# Altium PCB PCB.PcbDoc (part 1 of 2)
Units mm, origin at the board's own origin, x right, y up, seen from the top; angles counter-clockwise.
Board outline 225.9 x 54.5 mm, 2 copper layers (Top Layer, Bottom Layer); 254 components, 305 nets, 976 pads, 364 vias.
Unrouted connection lines stored in the file: 1.
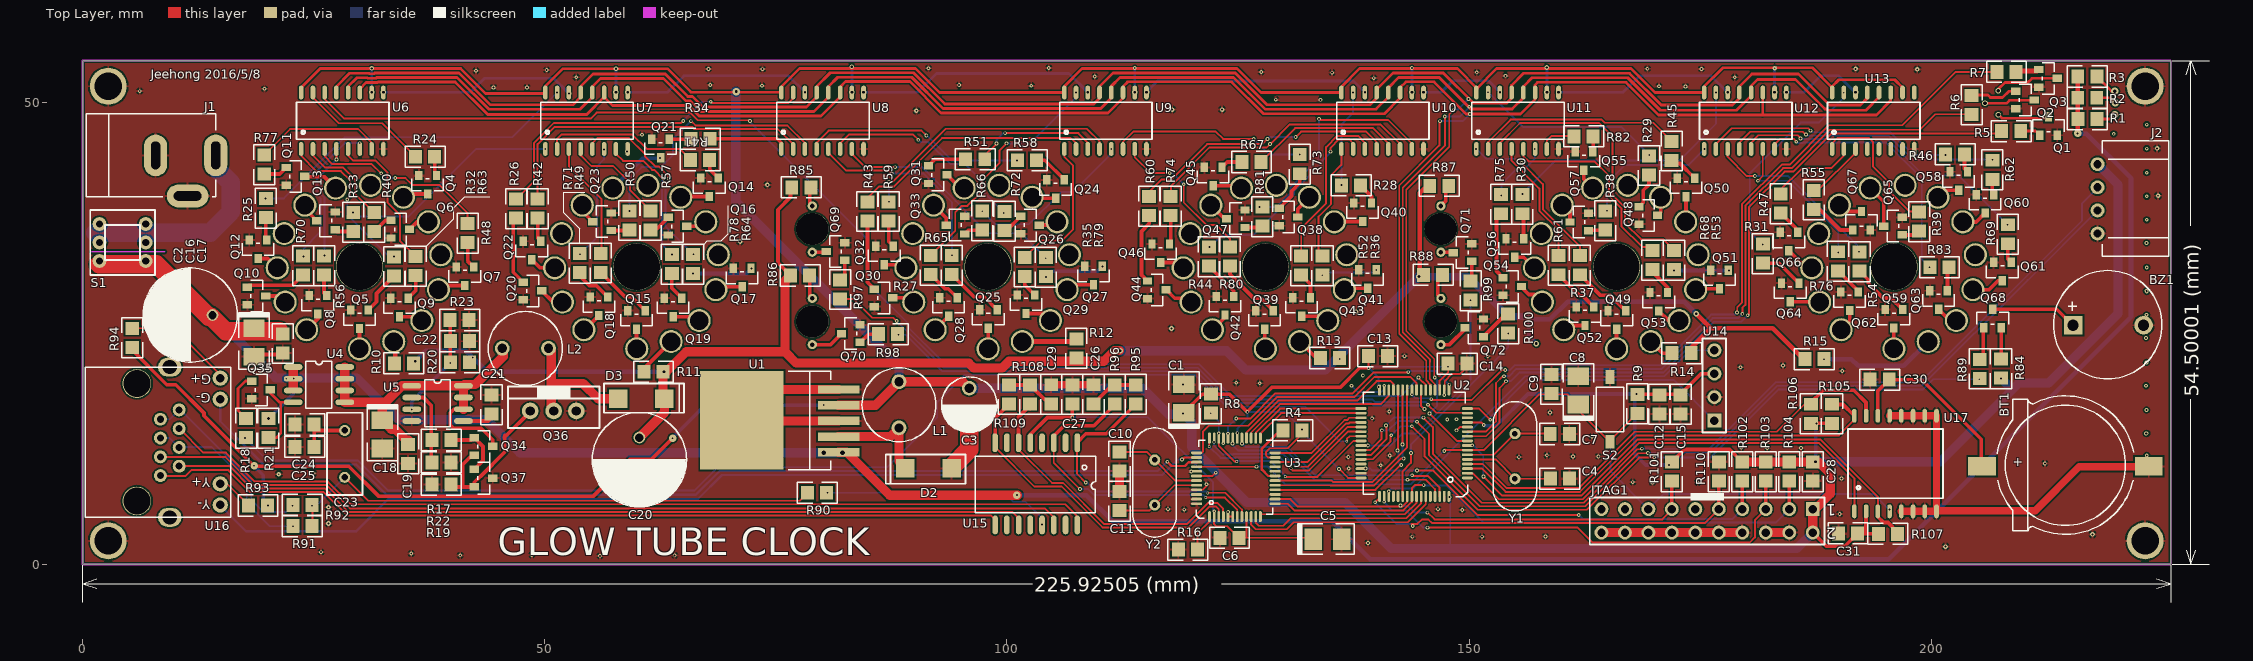
[diagram p0: Top Layer view]
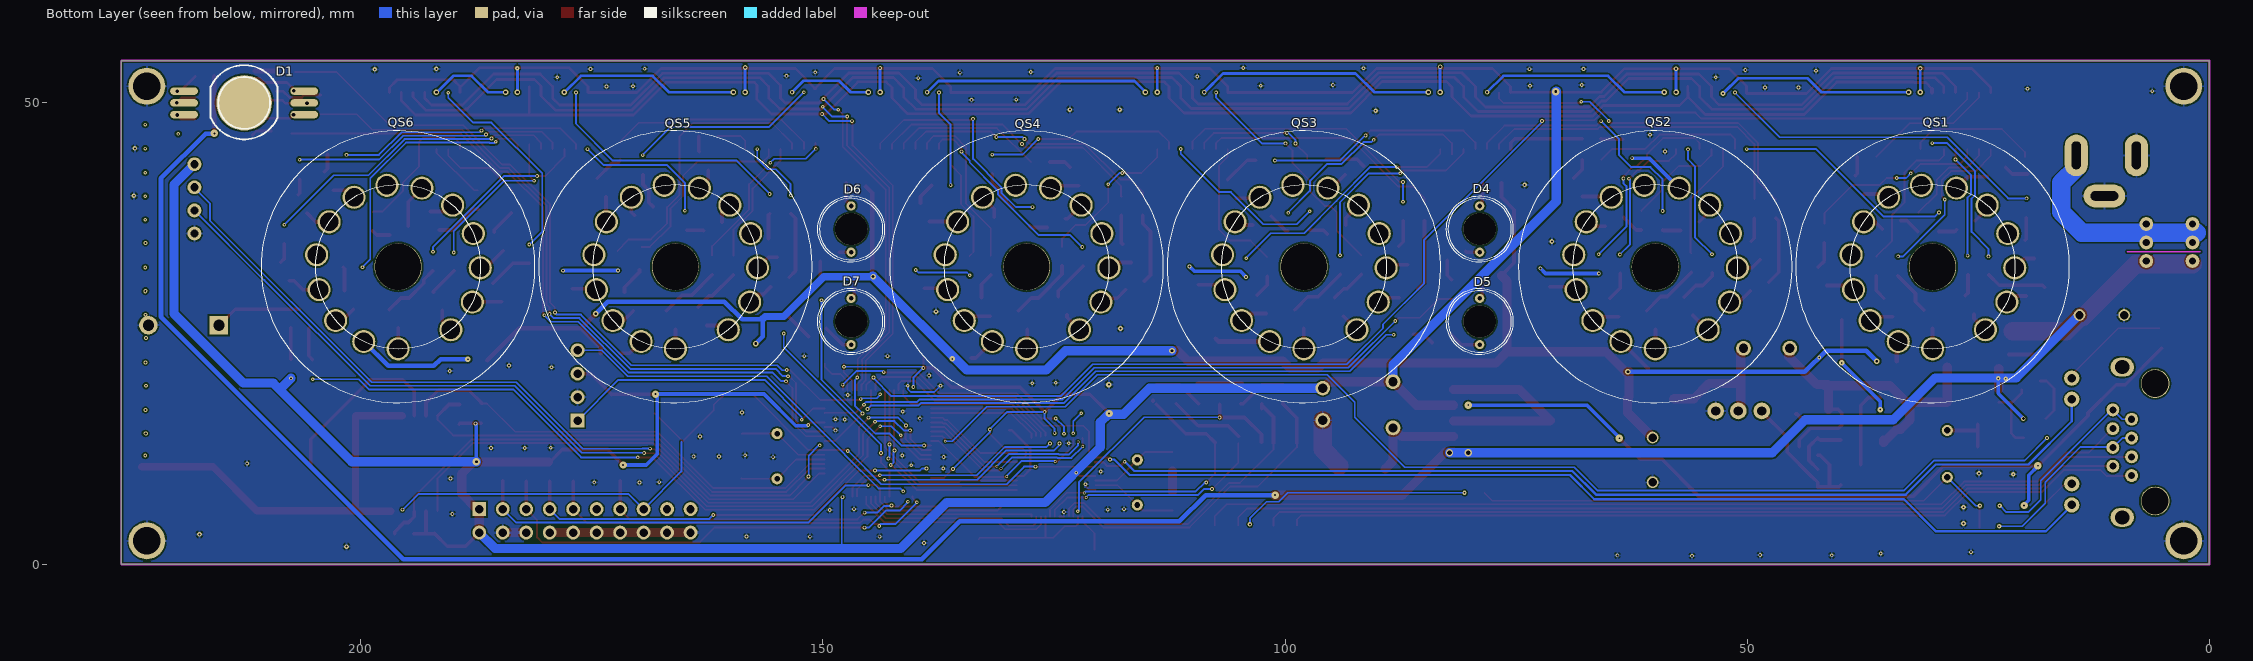
[diagram p1: Bottom Layer view, seen from below]

## Layer stack, top to bottom
Top Layer: signal copper 0.0356
Dielectric: dielectric 0.32, FR-4, Dk 4.8
Bottom Layer: signal copper 0.0356

## Board outline
0,54.5 0,0 225.9,0 225.9,54.5 0,54.5

## Design rules (kind name [scope] priority, off if disabled: settings)
Clearance [All] p1: gap=0.178
FabricationTestpoint [(IsPad And (OnTopLayer Or OnBottomLayer))] p1: side=3 testpointundercomponent=TRUE minsize=1.016 maxsize=2.54 preferedsize=1.524 minholesize=0 maxholesize=1.016 preferedholesize=0.813 testpointgrid=0.025 allowsidetop=TRUE allowsidebottom=TRUE usegrid=TRUE gridtolerance=0
PolygonConnect [All] p1: connectstyle=Relief reliefconductorwidth=0.254 reliefentries=4 polygonreliefangle="90 Angle"
RoomDefinition Sheet [InComponentClass('Sheet')] p1: confinementstyle=ConfineIn formatcopy=TRUE lockcomponents=FALSE outline -216.5,-246.109 -165.7,-246.109 -165.7,-220.709 -216.5,-220.709
RoutingVias [All] p1: holewidth=0.2 width=0.4 viastyle="Through Hole" minholewidth=0.1 minwidth=0.2 maxholewidth=3 maxwidth=5
SilkscreenOverComponentPads [All] p1: minsilkscreentomaskgap=0.254
SolderMaskExpansion [All] p1: expansion=0.102
Width [All] p1: maxlimit=4 minlimit=0.2 preferedwidth=0.254
26 further rules are at their usual default settings.

## Components (designator, comment, footprint, x,y, rotation, side; value= is the part's Value field where it differs from the comment)
BT1 "Battery" CR1220 214.75,10.35 r180 top locked
BZ1 "BELL" BEEZ 219.025,25.875 r180 top locked
C1 "Cap Pol1" SMT_CAP_DAN 119.125,18.025 r90 top
C2 "680uF/50V" 470/50V 11.775,26.975 r270 top
C3 "220uF/25V" 330/25V 95.92,17.289 r90 top
C4 "Cap" SMT0805 159.8,9.275 r0 top
C5 "Cap Pol1" SMT_CAP_DAN 134.75,2.725 r0 top
C6 "Cap" SMT0805 124.075,2.875 r180 top
C7 "Cap" SMT0805 159.785,14.105 r0 top
C8 "Cap Pol1" SMT_CAP_DAN 161.8,18.9 r90 top
C9 "Cap" SMT0805 158.9,19.5 r90 top
C10 "Cap" SMT0805 112.171,11.151 r270 top
C11 "Cap" SMT0805 112.171,6.833 r90 top
C12 "Cap" SMT0805 170.575,17.325 r270 top
C13 "Cap" SMT0805 140.125,22.525 r0 top
C14 "Cap" SMT0805 148.7,21.725 r0 top
C15 "Cap" SMT0805 172.875,17.325 r270 top
C16 "10uF/25V" SMT_CAP_DAN 18.55,23.925 r270 top
C17 "Cap" SMT0805 21.65,23.9 r270 top
C18 "10uF/25V" SMT_CAP_DAN 32.42,13.987 r270 top
C19 "Cap" SMT0805 35.214,11.955 r270 top
C20 "10uF/250V" 470/50V 60.233,11.447 r0 top
C21 "Cap" SMT0805 44.231,17.289 r90 top
C22 "Cap" SMT0805 40.802,24.147 r0 top
C23 "Cap" RAD-0.2 28.356,11.955 r270 top
C24 "Cap" SMT0805 24.038,15.13 r180 top
C25 "Cap" SMT0805 24.038,12.717 r180 top
C26 "Cap" SMT0805 109.358,18.39 r90 top
C27 "Cap" SMT0805 107.072,18.39 r270 top
C28 "Cap Semi" SMT0805 187.166,10.043 r90 top
C29 "Cap" SMT0805 104.786,18.39 r90 top
C30 "Cap Semi" SMT0805 194.396,19.986 r0 top
C31 "Cap Semi" SMT0805 190.975,3.35 r0 top
D1 "RGB" LED-RGB 212.6,49.925 r180 bottom
D2 "1N5824" FR107 94,10.375 r180 top
D3 "FR107" FR107 57.947,17.924 r0 top
D4 "LED0" DO 78.938,36.275 r270 bottom locked
D5 "LED0" DO 78.938,26.275 r270 bottom locked
D6 "LED0" DO 146.938,36.275 r270 bottom locked
D7 "LED0" DO 146.938,26.275 r270 bottom locked
J1 "PWR2.5" DC 7.8,44.175 r180 top
J2 "Header 4" HEAD_DIP4 217.85,39.475 r270 top
JTAG1 "Header 10X2H" HDR2X10 187.166,5.979 r180 top
L1 "33uH" L 88.3,17.289 r90 top
L2 "330uH" L 47.914,23.385 r0 top
Q1 "8050" SOP-23 211.725,46.425 r0 top
Q2 "8050" SOP-23 209.125,51.175 r270 top
Q3 "8050" SOP-23 211.625,53.525 r270 top
Q4 "A42" SOP-23 38.275,42.075 r180 top
Q5 "A42" SOP-23 30.9,27.525 r180 top
Q6 "A42" SOP-23 33.375,37.2 r270 top
Q7 "A42" SOP-23 42.3,32.175 r180 top
Q8 "A42" SOP-23 26.4,29.075 r180 top
Q9 "A42" SOP-23 35.225,28.8 r180 top
Q10 "A42" SOP-23 17.825,29.975 r270 top
Q11 "A42" SOP-23 22.025,42.925 r270 top
Q12 "A42" SOP-23 19.925,35.1 r180 top
Q13 "A42" SOP-23 27.325,36.225 r90 top
Q14 "A42" SOP-23 68.75,41.8 r180 top
Q15 "A42" SOP-23 60.868,27.449 r180 top
Q16 "A42" SOP-23 63.35,37.525 r270 top
Q17 "A42" SOP-23 72.3,32.025 r180 top
Q18 "A42" SOP-23 56.8,28.925 r180 top
Q19 "A42" SOP-23 64.825,28.8 r180 top
Q20 "A42" SOP-23 47.675,30.525 r270 top
Q21 "A42" SOP-23 63.475,46 r180 top
Q22 "A42" SOP-23 49.55,34.95 r180 top
Q23 "A42" SOP-23 57.2,36.125 r90 top
Q24 "A42" SOP-23 106.2,41.6 r180 top
Q25 "A42" SOP-23 98.925,27.55 r180 top
Q26 "A42" SOP-23 101.5,37.65 r270 top
Q27 "A42" SOP-23 110.3,32.25 r180 top
Q28 "A42" SOP-23 94.625,28.85 r180 top
Q29 "A42" SOP-23 103,29.15 r180 top
Q30 "A42" SOP-23 85.65,29.775 r270 top
Q31 "A42" SOP-23 91.5,43.1 r270 top
Q32 "A42" SOP-23 87.675,34.425 r180 top
Q33 "8050" SOP-23 95.425,35.75 r90 top
Q34 "8050" SOP-23 42.376,13.704 r270 top
Q35 "A40" SOP-23 18.3,19.825 r270 top
Q36 "MOSFET-N" TO-220 46.009,14.749 r0 top
Q37 "8550" SOP-23 42.376,10.275 r270 top
Q38 "A42" SOP-23 129.45,38.525 r270 top
Q39 "A42" SOP-23 128.813,27.449 r180 top
Q40 "A42" SOP-23 139.425,39.1 r180 top
Q41 "A42" SOP-23 139.95,31.875 r180 top
Q42 "A42" SOP-23 124.525,28.975 r180 top
Q43 "A42" SOP-23 132.825,28.85 r180 top
Q44 "A42" SOP-23 115.2,30.65 r270 top
Q45 "A42" SOP-23 123.25,42.95 r180 top
Q46 "A42" SOP-23 117.575,34.65 r180 top
Q47 "A42" SOP-23 125.75,36.45 r90 top
Q48 "A42" SOP-23 168.375,38.7 r270 top
Q49 "A42" SOP-23 166.913,27.449 r180 top
Q50 "A42" SOP-23 174.4,41.775 r180 top
Q51 "A42" SOP-23 178.025,31.825 r180 top
Q52 "A42" SOP-23 163.475,27.85 r180 top
Q53 "A42" SOP-23 171.45,29.425 r180 top
Q54 "A42" SOP-23 153.65,31 r270 top
Q55 "A42" SOP-23 163.35,44.65 r180 top
Q56 "A42" SOP-23 155.875,35.225 r180 top
Q57 "A42" SOP-23 162.9,36.1 r90 top
Q58 "A42" SOP-23 203.9,42.475 r180 top
Q59 "A42" SOP-23 196.885,27.576 r180 top
Q60 "A42" SOP-23 206.75,40 r180 top
Q61 "A42" SOP-23 208.625,32.675 r180 top
Q62 "A42" SOP-23 192.1,29.475 r180 top
Q63 "A42" SOP-23 201.725,29.6 r180 top
Q64 "A42" SOP-23 185.675,30.425 r180 top
Q65 "A42" SOP-23 196.85,35.65 r90 top
Q66 "A42" SOP-23 185.525,35.925 r180 top
Q67 "A42" SOP-23 191.5,36.175 r0 top
Q68 "8550" SOP-23 205.675,25.6 r0 top
Q69 "A40" SOP-23 82.458,32.91 r90 top
Q70 "A40" SOP-23 84.109,24.02 r90 top
Q71 "A40" SOP-23 150.276,32.783 r90 top
Q72 "A40" SOP-23 151.546,24.655 r90 top
QS1 "IN-4" IN-4 29.95,32.2 r180 bottom locked
QS2 "IN-4" IN-4 59.95,32.2 r180 bottom locked
QS3 "IN-4" IN-4 97.95,32.2 r180 bottom locked
QS4 "IN-4" IN-4 127.95,32.2 r180 bottom locked
QS5 "IN-4" IN-4 165.95,32.2 r180 bottom locked
QS6 "IN-4" IN-4 195.95,32.2 r180 bottom locked
R1 "Res2" SMT0805 216.875,48.175 r0 top
R2 "Res2" SMT0805 216.875,50.475 r180 top
R3 "Res2" SMT0805 216.85,52.775 r0 top
R4 "Res2" SMT0805 130.9,14.5 r180 top
R5 "Res2" SMT0805 208.65,46.875 r180 top
R6 "Res2" SMT0805 204.35,49.725 r270 top
R7 "Res2" SMT0805 208.125,53.275 r180 top
R8 "Res2" SMT0805 122.05,17.4 r270 top
R9 "Res2" SMT0805 168.2,17.375 r270 top
R10 "Res2" SMT0805 34.75,21.75 r0 top
R11 "Res2" SMT0805 61.757,20.845 r0 top
R12 "Res2" SMT0805 107.5,23.375 r270 top
R13 "Res2" SMT0805 134.925,22.325 r0 top
R14 "Res2" SMT0805 172.975,22.85 r0 top
R15 "Res2" SMT0805 187.35,22.2 r180 top
R16 "Res2" SMT0805 119.575,1.6 r180 top
R17 "Res2" SMT0805 38.82,13.45 r0 top
R18 "Res2" SMT0805 17.688,14.749 r90 top
R19 "Res2" SMT0805 38.82,8.624 r0 top
R20 "Res2" SMT0805 40.802,21.861 r0 top
R21 "Res2" SMT0805 20.101,14.749 r270 top
R22 "Res2" SMT0805 38.82,11.037 r180 top
R23 "Res2" SMT0805 40.802,26.433 r180 top
R24 "Res2" SMT0805 37.075,44.1 r180 top
R25 "Res2" SMT0805 19.825,38.525 r90 top
R26 "Res2" SMT0805 46.9,38.475 r90 top
R27 "Res2" SMT0805 91.75,32.375 r90 top
R28 "Res2" SMT0805 137.225,41 r180 top
R29 "Res2" SMT0805 169.45,43.15 r90 top
R30 "Res2" SMT0805 155.75,38.95 r90 top
R31 "Res2" SMT0805 181.775,33.6 r90 top
R32 "Res2" SMT0805 33.7,32.225 r90 top
R33 "Res2" SMT0805 29.275,37.025 r90 top
R34 "Res2" SMT0805 66.825,46.05 r0 top
R35 "Res2" SMT0805 101.925,32.175 r90 top
R36 "Res2" SMT0805 134.125,32.325 r90 top
R37 "Res2" SMT0805 161.975,32.35 r90 top
R38 "Res2" SMT0805 164.725,37.175 r90 top
R39 "Res2" SMT0805 198.675,37.075 r90 top
R40 "Res2" SMT0805 31.55,37.025 r90 top
R41 "Res2" SMT0805 66.825,43.75 r180 top
R42 "Res2" SMT0805 49.225,38.475 r90 top
R43 "Res2" SMT0805 84.9,38.175 r90 top
R44 "Res2" SMT0805 121.85,33.275 r90 top
R45 "Res2" SMT0805 171.9,44.725 r90 top
R46 "Res2" SMT0805 202.575,44.35 r180 top
R47 "Res2" SMT0805 183.7,39.025 r90 top
R48 "Res2" SMT0805 41.65,35.825 r90 top
R49 "Res2" SMT0805 56.05,32.6 r90 top
R50 "Res2" SMT0805 59.15,37.2 r90 top
R51 "Res2" SMT0805 96.55,43.825 r0 top
R52 "Res2" SMT0805 131.825,32.325 r90 top
R53 "Res2" SMT0805 172.15,32.9 r90 top
R54 "Res2" SMT0805 192.225,32.75 r90 top
R55 "Res2" SMT0805 187.275,39.425 r90 top
R56 "Res2" SMT0805 26.125,32.325 r90 top
R57 "Res2" SMT0805 61.45,37.2 r90 top
R58 "Res2" SMT0805 102.175,43.725 r180 top
R59 "Res2" SMT0805 87.2,38.175 r90 top
R60 "Res2" SMT0805 115.375,38.75 r90 top
R61 "Res2" SMT0805 159.675,32.35 r90 top
R62 "Res2" SMT0805 206.6,42.675 r90 top
R63 "Res2" SMT0805 36.025,32.25 r90 top
R64 "Res2" SMT0805 66.05,32.475 r90 top
R65 "Res2" SMT0805 94.025,32.375 r90 top
R66 "Res2" SMT0805 97.325,37.175 r90 top
R67 "Res2" SMT0805 126.45,43.525 r0 top
R68 "Res2" SMT0805 169.825,32.9 r90 top
R69 "Res2" SMT0805 208.275,35.7 r90 top
R70 "Res2" SMT0805 23.85,32.325 r90 top
R71 "Res2" SMT0805 53.775,32.575 r90 top
R72 "Res2" SMT0805 99.725,37.125 r90 top
R73 "Res2" SMT0805 131.675,43.275 r90 top
R74 "Res2" SMT0805 117.7,38.75 r90 top
R75 "Res2" SMT0805 153.45,38.95 r90 top
R76 "Res2" SMT0805 189.9,32.775 r90 top
R77 "Res2" SMT0805 19.65,43.25 r90 top
R78 "Res2" SMT0805 63.75,32.475 r90 top
R79 "Res2" SMT0805 104.2,32.15 r90 top
R80 "Res2" SMT0805 124.114,33.291 r90 top
R81 "Res2" SMT0805 127.625,37.625 r90 top
R82 "Res2" SMT0805 162.4,46.3 r180 top
R83 "Res2" SMT0805 200.875,32.15 r180 top
R84 "Res2" SMT0805 207.525,21.175 r90 top
R85 "Res2" SMT0805 77.759,40.784 r180 top
R86 "Res2" SMT0805 77.632,31.259 r180 top
R87 "Res2" SMT0805 146.775,40.95 r180 top
R88 "Res2" SMT0805 146.1,31.325 r180 top
R89 "Res2" SMT0805 205.225,21.15 r270 top
R90 "Res2" SMT0805 79.475,7.75 r180 top
R91 "Res2" SMT0805 23.775,4.15 r0 top
R92 "Res2" SMT0805 23.775,6.425 r0 top
R93 "Res2" SMT0805 18.975,6.375 r0 top
R94 "Res2" SMT0805 5.375,24.525 r270 top
R95 "Res2" SMT0805 113.925,18.4 r270 top
R96 "Res2" SMT0805 111.65,18.4 r270 top
R97 "Res2" SMT0805 81.95,29.735 r90 top
R98 "Res2" SMT0805 87.157,24.909 r180 top
R99 "Res2" SMT0805 150.149,29.608 r90 top
R100 "Res2" SMT0805 154.213,26.052 r90 top
R101 "Res2" SMT0805 171.926,10.043 r90 top
R102 "Res2" SMT0805 179.546,10.043 r270 top
R103 "Res2" SMT0805 182.086,10.043 r270 top
R104 "Res2" SMT0805 184.626,10.043 r90 top
R105 "Res2" SMT0805 189.243,16.309 r270 top
R106 "Res2" SMT0805 186.957,16.309 r270 top
R107 "Res2" SMT0805 195.3,3.3 r180 top
R108 "Res2" SMT0805 102.5,18.39 r270 top
R109 "Res2" SMT0805 100.214,18.39 r270 top
R110 "Res2" SMT0805 177.006,10.043 r270 top
S1 "Header 3X2A" LOCK_SW_DIP6 0.825,38.325 r270 top
S2 "SW-PB" KEY 165.225,16.9 r270 top
U1 "*" LM2575 71.409,15.511 r90 top
U2 "STM32F103RCT6" LQFP64 143.799,13.352 r180 top locked
U3 "DM9000" LQFP48 125.13,9.415 r90 top locked
U4 "AO4423L" SOP_8 25.562,19.575 r0 top
U5 "MC34063" SOP_8 38.389,17.543 r0 top
U6 "74HC595" SOT109-1 23.149,45.991 r0 top locked
U7 "74HC595" SOT109-1 49.565,45.991 r0 top locked
U8 "74HC595" SOT109-1 75.092,45.991 r0 top locked
U9 "74HC595" SOT109-1 105.699,45.991 r0 top locked
U10 "74HC595" SOT109-1 135.671,45.991 r0 top locked
U11 "74HC595" SOT109-1 150.276,45.991 r0 top locked
U12 "74HC595" SOT109-1 174.914,45.991 r0 top locked
U13 "74HC595" SOT109-1 188.757,45.991 r0 top locked
U14 "Header 4" HDR1X4 176.525,15.55 r90 top
U15 "HN16613CG" SOJ16-T 102.143,8.22 r270 top locked
U16 "RJ-45" RJ45-LED 0.35,21.35 r270 top locked
U17 "DS3231" DS3231 190.967,7.159 r0 top locked
Y1 "8M" XTAL_DIP 154.95,11.575 r270 top
Y2 "25M" XTAL_DIP 115.981,8.992 r90 top

## Footprints (in the part's own frame and the unit in brackets; to place one, negate y for a bottom-side part, rotate by r counter-clockwise, add the part's x,y. Pads: shape width x height; smd on the part's side, far side on the other; paste and mask are expansions set on the pad)
330/25V [mil]
  round 62 hole 39.37: 1(70,0) 2(-67,0)
  silkscreen extent -120,-120 118,120
470/50V [mil]
  round 50 hole 36: 1(0.1,89.6) 2(0.1,-100.56)
  silkscreen extent -201,-206 201,196
BEEZ [mm]
  rect 2x2 hole 1.2: 1(3.686,0)
  round 2 hole 1.2: 2(-3.934,0)
  silkscreen extent -5.9,-5.92 5.81,5.79
CR1220 [mm]
  rect 3x2 smd: 1(9.271,-0.254) 2(-8.763,-0.254)
  silkscreen extent -7.11,-7.88 7.65,7.1
DC [mm]
  oval 2.5x4.5 hole 1 slot 3 at 90 deg: 1(-6.604,-0.072) 3(-0.104,-0.072)
  oval 4.5x2.5 hole 1 slot 3 at 0 deg: 2(-3.556,4.318)
  silkscreen extent -6.6,-4.57 7.4,4.45
DO [mm]
  round 3.5 hole 3.5: 0(0,0)
  round 1 hole 0.5: 1(-2.5,0) 2(2.5,0)
  silkscreen extent -3.6,-3.6 3.6,3.6
DS3231 [mm]
  oval 0.5x1.5 smd: 1(0.7,-1.42) 2(1.97,-1.42) 3(3.24,-1.42) 4(4.51,-1.42) 5(5.78,-1.42) 6(7.05,-1.42) 7(8.32,-1.42) 8(9.59,-1.42) 9(9.59,8.92) 10(8.32,8.92) 11(7.05,8.92) 12(5.78,8.92) 13(4.51,8.92) 14(3.24,8.92) 15(1.97,8.92) 16(0.7,8.92)
  silkscreen extent 0,0 10.29,7.5
FR107 [mm]
  rect 2x2 smd: 1(0,0) 2(5,0)
  silkscreen extent -1.52,-1.52 7.11,1.65
HDR1X4 [mm] "Connector; Header; 4 Position"
  rect 1.5x1.5 hole 0.9: 1(0,0)
  round 1.5 hole 0.9: 2(2.54,0) 3(5.08,0) 4(7.62,0)
  silkscreen extent -1.27,-1.27 8.89,1.27
HDR2X10 [mm] "Connector; Header; 10x2 Position"
  rect 1.5x1.5 hole 0.9: 1(0,0)
  round 1.5 hole 0.9: 2(0,2.54) 3(2.54,0) 4(2.54,2.54) 5(5.08,0) 6(5.08,2.54) 7(7.62,0) 8(7.62,2.54) 9(10.16,0) 10(10.16,2.54) 11(12.7,0) 12(12.7,2.54) 13(15.24,0) 14(15.24,2.54) 15(17.78,0) 16(17.78,2.54) 17(20.32,0) 18(20.32,2.54) 19(22.86,0) 20(22.86,2.54)
  silkscreen extent -1.27,-1.27 24.13,3.81
HEAD_DIP4 [mm]
  round 1.5 hole 0.9: 1(-3.817,0.127) 2(-1.317,0.127) 3(1.183,0.127) 4(3.683,0.127)
  silkscreen extent -6.35,0.63 6.15,7.84
IN-4 [mm]
  round 5.1 hole 5: 0(0,0)
  round 2.5 hole 2: 1(5.72,-6.82) 2(8.04,-3.82) 3(8.89,-0.12) 4(8.14,3.59) 5(5.9,6.66) 6(2.59,8.51) 7(-1.2,8.81) 8(-4.76,7.52) 9(-7.46,4.85) 10(-8.81,1.3) 11(-8.55,-2.48) 12(-6.75,-5.82) 13(-3.71,-8.09) 14(0,-8.89)
  silkscreen extent -14.75,-14.75 14.75,14.75
KEY [mm]
  rect 1.5x1 smd: 1(-3.373,0) 2(3.627,0)
  silkscreen extent -2.29,-1.5 2.54,1.5
L [mm]
  round 1.6 hole 1: 1(-2.521,-0.012) 2(2.479,-0.012)
  silkscreen extent -4.02,-4.01 3.98,3.99
LED-RGB [mm]
  round 6 smd: 0(0,0)
  oval 3x0.8 smd: 1(-6.5,1.27) 2(-6.5,0) 3(-6.5,-1.27) 4(6.5,1.27) 5(6.5,0) 6(6.5,-1.27)
  silkscreen extent -3.62,-3.95 3.62,4.07
LM2575 [mm]
  rect 10.668x9 smd: 0(0.063,0.092)
  rect 0.91x4.5 smd: 1(-3.388,-10.374) 2(-1.688,-10.374) 3(0.012,-10.374) 4(1.712,-10.374) 5(3.412,-10.374)
  silkscreen extent -5.27,-9.5 5.4,-4.95
LOCK_SW_DIP6 [mm]
  round 1.5 hole 0.8: 1(1.5,1) 2(3.5,1) 3(5.5,1) 4(5.5,6) 5(3.5,6) 6(1.5,6)
  silkscreen extent 0,0 7,7
LQFP48 [mm]
  oval 1.2x0.3 smd: 1(-4.25,3.22) 2(-4.25,2.72) 3(-4.25,2.22) 4(-4.25,1.72) 5(-4.25,1.22) 6(-4.25,0.72) 7(-4.25,0.22) 8(-4.25,-0.28) 9(-4.25,-0.78) 10(-4.25,-1.28) 11(-4.25,-1.78) 12(-4.25,-2.28) 25(4.25,-2.28) 26(4.25,-1.78) 27(4.25,-1.28) 28(4.25,-0.78) 29(4.25,-0.28) 30(4.25,0.22) 31(4.25,0.72) 32(4.25,1.22) 33(4.25,1.72) 34(4.25,2.22) 35(4.25,2.72) 36(4.25,3.22)
  oval 0.3x1.2 smd: 13(-2.85,-3.88) 14(-2.35,-3.88) 15(-1.85,-3.88) 16(-1.35,-3.88) 17(-0.85,-3.88) 18(-0.35,-3.88) 19(0.15,-3.88) 20(0.65,-3.88) 21(1.15,-3.88) 22(1.65,-3.88) 23(2.15,-3.88) 24(2.65,-3.88) 37(2.65,4.62) 38(2.15,4.62) 39(1.65,4.62) 40(1.15,4.62) 41(0.65,4.62) 42(0.15,4.62) 43(-0.35,4.62) 44(-0.85,4.62) 45(-1.35,4.62) 46(-1.85,4.62) 47(-2.35,4.62) 48(-2.85,4.62)
  silkscreen extent -4.42,-3.63 4,4.66
LQFP64 [mm]
  oval 1.2x0.3 smd: 1(-6.004,3.993) 2(-6.004,3.493) 3(-6.004,2.993) 4(-6.004,2.493) 5(-6.004,1.993) 6(-6.004,1.493) 7(-6.004,0.993) 8(-6.004,0.493) 9(-6.004,-0.007) 10(-6.004,-0.507) 11(-6.004,-1.007) 12(-6.004,-1.507) 13(-6.004,-2.007) 14(-6.004,-2.507) 15(-6.004,-3.007) 16(-6.004,-3.507) 33(5.496,-3.507) 34(5.496,-3.007) 35(5.496,-2.507) 36(5.496,-2.007) 37(5.496,-1.507) 38(5.496,-1.007) 39(5.496,-0.507) 40(5.496,-0.007) 41(5.496,0.493) 42(5.496,0.993) 43(5.496,1.493) 44(5.496,1.993) 45(5.496,2.493) 46(5.496,2.993) 47(5.496,3.493) 48(5.496,3.993)
  oval 0.3x1.2 smd: 17(-4.004,-5.507) 18(-3.504,-5.507) 19(-3.004,-5.507) 20(-2.504,-5.507) 21(-2.004,-5.507) 22(-1.504,-5.507) 23(-1.004,-5.507) 24(-0.504,-5.507) 25(-0.004,-5.507) 26(0.496,-5.507) 27(0.996,-5.507) 28(1.496,-5.507) 29(1.996,-5.507) 30(2.496,-5.507) 31(2.996,-5.507) 32(3.496,-5.507) 49(3.496,5.993) 50(2.996,5.993) 51(2.496,5.993) 52(1.996,5.993) 53(1.496,5.993) 54(0.996,5.993) 55(0.496,5.993) 56(-0.004,5.993) 57(-0.504,5.993) 58(-1.004,5.993) 59(-1.504,5.993) 60(-2.004,5.993) 61(-2.504,5.993) 62(-3.004,5.993) 63(-3.504,5.993) 64(-4.004,5.993)
  silkscreen extent -6.02,-5.26 5.25,6.06
RAD-0.2 [mm] "Radial Cap, Thru-Hole; 2 Leads; 0.2 in Pin Spacing"
  round 1.2 hole 0.7: 1(-2.54,0) 2(2.54,0)
  silkscreen extent -4.44,-1.91 4.44,1.91
RJ45-LED [mil]
  oval 80x100 hole 60: 0(0.44,357.49) 0(640.44,357.49)
  round 122.05 hole 114.17 unplated: 0(70.44,217.49) 0(570.44,217.49)
  round 55 hole 30: 1(462.44,317.49) 2(422.44,397.49) 3(382.44,317.49) 4(342.44,397.49) 5(302.44,317.49) 6(262.44,397.49) 7(222.44,317.49) 8(182.44,397.49)
  round 65 hole 36: 9(587.44,572.49) 10(497.44,572.49) 11(137.44,572.49) 12(47.44,572.49)
  silkscreen extent 0,-3 640,617
SMT0805 [mm]
  rect 1.4x1.5 smd: 1(-1.016,0) 2(1.044,0)
  silkscreen extent -2.16,-1.14 2.16,1.14
SMT_CAP_DAN [mil]
  rect 75x90 smd: 1(-62.98,0) 2(57.02,0)
  silkscreen extent -130,-65 110,65
SOJ16-T [mil]
  oval 80x24 smd: 1(-194.56,214.99) 2(-194.56,164.99) 3(-194.56,114.99) 4(-194.56,64.99) 5(-194.56,14.99) 6(-194.56,-35.01) 7(-194.56,-85.01) 8(-194.56,-135.01) 9(155.44,-135.01) 10(155.44,-85.01) 11(155.44,-35.01) 12(155.44,14.99) 13(155.44,64.99) 14(155.44,114.99) 15(155.44,164.99) 16(155.44,214.99)
  silkscreen extent -138,-219 103,293
SOP-23 [mm]
  rect 0.8x1 smd: 1(-0.008,0) 2(1.892,0) 3(0.942,2)
  silkscreen extent -0.76,0.38 2.67,1.65
SOP_8 [mil]
  oval 80x24 smd: 1(-109.56,69.99) 2(-109.56,19.99) 3(-109.56,-30.01) 4(-109.56,-80.01) 5(110.44,-80.01) 6(110.44,-30.01) 7(110.44,19.99) 8(110.44,69.99)
  silkscreen extent -55,-105 55,95
SOT109-1 [mm]
  oval 0.5x1.5 smd: 1(0.5,-1.05) 2(1.77,-1.05) 3(3.04,-1.05) 4(4.31,-1.05) 5(5.58,-1.05) 6(6.85,-1.05) 7(8.12,-1.05) 8(9.39,-1.05) 9(9.39,5.05) 10(8.12,5.05) 11(6.85,5.05) 12(5.58,5.05) 13(4.31,5.05) 14(3.04,5.05) 15(1.77,5.05) 16(0.5,5.05)
  silkscreen extent 0,0 10,4
TO-220 [mm]
  round 1.8 hole 1: 1(2.41,1.85) 2(4.95,1.85) 3(7.4,1.85)
  silkscreen extent 0,0 9.9,4.57
XTAL_DIP [mm]
  round 1.2 hole 0.6: 1(-2.567,0) 2(2.313,0)
  silkscreen extent -6.03,-2.35 5.78,2.35

## Part data
BT1: "Multicell Battery"
BZ1: "Bell"
C1 C5 C8: "Polarized Capacitor (Radial)"
C2 C3 C16 C18 C20: library part ELECTRO1, "Electrolytic Capacitor"
C4 C6 C7 C9 C10 C11 C12 C13 C14 C15 C17 C19 C21 C22 C23 C24 C25 C26 C27 C29: "Capacitor"
C28 C30 C31: "Capacitor (Semiconductor SIM Model)"
D1: library part "Header 3X2A", "Header, 3-Pin, Dual row"
D2 D3: library part "D Schottky", "Schottky Diode"
D4 D5 D6 D7: "Typical INFRARED GaAs LED"
J1: "Low Voltage Power Supply Connector"
J2 U14: "Header, 4-Pin"
JTAG1: "Header, 10-Pin, Dual row, Right Angle"
L1 L2: library part "INDUCTOR IRON"
Q1 Q2 Q3 Q4 Q5 Q6 Q7 Q8 Q9 Q10 Q11 Q12 Q13 Q14 Q15 Q16 Q17 Q18 Q19 Q20 Q21 Q22 Q23 Q24 Q25 Q26 Q27 Q28 Q29 Q30 Q31 Q32 Q33 Q34 Q35 Q38 Q39 Q40 Q41 Q42 Q43 Q44 Q45 Q46 Q47 Q48 Q49 Q50 Q51 Q52 Q53 Q54 Q55 Q56 Q57 Q58 Q59 Q60 Q61 Q62 Q63 Q64 Q65 Q66 Q67 Q69 Q70 Q71 Q72: library part 2N3904, "NPN General Purpose Amplifier"
Q36: "N-Channel MOSFET"
Q37 Q68: library part 2N3906, "PNP General Purpose Amplifier"
R1 R2 R3 R4 R5 R6 R7 R8 R9 R10 R11 R12 R13 R14 R15 R16 R17 R18 R19 R20 R21 R22 R23 R24 R25 R26 R27 R28 R29 R30 R31 R32 R33 R34 R35 R36 R37 R38 R39 R40 R41 R42 R43 R44 R45 R46 R47 R48 R49 R50 R51 R52 R53 R54 R55 R56 R57 R58 R59 R60 R61 R62 R63 R64 R65 R66 R67 R68 R69 R70 R71 R72 R73 R74 R75 R76 R77 R78 R79 R80 R81 R82 R83 R84 R85 R86 R87 R88 R89 R90 R91 R92 R93 R94 R95 R96 R97 R98 R99 R100 R101 R102 R103 R104 R105 R106 R107 R108 R109 R110: "Resistor"
S1: "Header, 3-Pin, Dual row"
S2: "Switch"
U1: library part LM2596
Y1 Y2: library part XTAL, "Crystal Oscillator"

## Free pads (board coordinates)
  round 4 hole 3: 0(2.775,2.55) 0(2.775,51.725) 0(223.125,2.55) 0(223.125,51.725)

## Via types
v1: diameter 0.4, hole 0.2, Top Layer to Bottom Layer, 274 vias
v2: diameter 0.5, hole 0.2, Top Layer to Bottom Layer, 23 vias
v3: diameter 0.6, hole 0.3, Top Layer to Bottom Layer, 22 vias
v4: diameter 0.8, hole 0.2, Top Layer to Bottom Layer, 9 vias
v5: diameter 0.5, hole 0.25, Top Layer to Bottom Layer, 9 vias
v6: diameter 0.3, hole 0.2, Top Layer to Bottom Layer, 9 vias
v7: diameter 0.6, hole 0.2, Top Layer to Bottom Layer, 5 vias
v8: diameter 0.6, hole 0.4, Top Layer to Bottom Layer, 3 vias
v9: diameter 0.8, hole 0.4, Top Layer to Bottom Layer, 3 vias
v10: diameter 0.47, hole 0.2, Top Layer to Bottom Layer, 2 vias
v11: diameter 0.8, hole 0.3, Top Layer to Bottom Layer, 2 vias
v12: diameter 0.8, hole 0.5, Top Layer to Bottom Layer, 2 vias
v13: diameter 0.5, hole 0.3, Top Layer to Bottom Layer, 1 vias

## Nets (pads, with @x,y where several pads share a name; then routed paths per layer and width w, separated by ;. In a path a pad name is that pad's centre, name@x,y a point inside that pad or via, vN(x,y) a via of type N, cw(c..) or ccw(c..) an arc to the next point about the centre after c; other vN are vias at no path point)
C0: Q4.3 QS1.8 | length 2.8
  Top Layer w0.4: QS1.8@34.71,39.72 35.065,40.075 Q4.3@37.333,40.075
C1: Q5.3 QS1.14 | length 2.2
  Top Layer w0.4: QS1.14@29.95,23.31 29.958,23.318 Q5.3@29.958,25.525
C2: Q6.3 QS1.9 | length 2.4
  Top Layer w0.4: Q6.3@35.375,36.258 36.167,37.05 QS1.9@37.41,37.05
C3: Q7.3 QS1.11 | length 3
  Top Layer w0.4: QS1.11@38.5,29.72 38.955,30.175 Q7.3@41.358,30.175
C4: Q8.3 QS1.1 | length 2.2
  Top Layer w0.4: QS1.1@24.23,25.38 25.458,26.608 Q8.3@25.458,27.075
C5: Q9.3 QS1.12 | length 2.6
  Top Layer w0.4: Q9.3@34.283,26.8 36.28,26.8 QS1.12@36.7,26.38
C6: Q10.3 QS1.2 | length 2.4
  Top Layer w0.4: Q10.3@19.825,29.033 21.257,29.033 QS1.2@21.91,28.38
C7: Q11.3 QS1.6 | length 3.9
  Top Layer w0.4: Q11.3@24.025,41.983 24.058,41.95 26.12,41.95 QS1.6@27.36,40.71
C8: Q12.3 QS1.3 | length 2.5
  Top Layer w0.4: Q12.3@18.983,33.1 20.04,33.1 QS1.3@21.06,32.08
C9: Q13.3 QS1.5 | length 2.2
  Top Layer w0.4: QS1.5@24.05,38.86 24.05,38.442 Q13.3@25.325,37.167
C10: Q14.3 QS2.8 | length 3.1
  Top Layer w0.4: QS2.8@64.71,39.72 64.79,39.8 Q14.3@67.808,39.8
C11: Q15.3 QS2.14 | length 2.1
  Top Layer w0.4: Q15.3@59.926,25.449 59.926,23.334 QS2.14@59.95,23.31
C12: Q16.3 QS2.9 | length 2.3
  Top Layer w0.4: Q16.3@65.35,36.583 66.943,36.583 QS2.9@67.41,37.05
C13: Q17.3 QS2.11 | length 3
  Top Layer w0.4: QS2.11@68.5,29.72 68.805,30.025 Q17.3@71.358,30.025
C14: Q18.3 QS2.1 | length 2.3
  Top Layer w0.4: QS2.1@54.23,25.38 54.313,25.38 Q18.3@55.858,26.925
C15: Q19.3 QS2.12 | length 3
  Top Layer w0.4: Q19.3@63.883,26.8 66.28,26.8 QS2.12@66.7,26.38
C16: Q20.3 QS2.2 | length 2.7
  Top Layer w0.4: Q20.3@49.675,29.583 50.878,28.38 QS2.2@51.91,28.38
C17: Q21.3 QS2.6 | length 6.5
  Bottom Layer w0.2: QS2.6@57.36,40.71 QS2.6@57.385,40.71 ; v1(62.45,43.95) v1@62.5,43.95
  Bottom Layer w0.4: QS2.6@57.385,40.71 60.625,43.95 v1(62.45,43.95)
C18: Q22.3 QS2.3 | length 2.8
  Top Layer w0.4: Q22.3@48.608,32.95 49.478,32.08 QS2.3@51.06,32.08
C19: Q23.3 QS2.5 | length 2.3
  Top Layer w0.4: QS2.5@54.05,38.86 54.05,38.217 Q23.3@55.2,37.067
C20: Q24.3 QS3.8 | length 2.6
  Top Layer w0.4: QS3.8@102.71,39.72 102.83,39.6 Q24.3@105.258,39.6
C21: Q25.3 QS3.14 | length 2.3
  Top Layer w0.4: QS3.14@97.95,23.31 97.983,23.343 Q25.3@97.983,25.55
C22: Q26.3 QS3.9 | length 2.1
  Top Layer w0.4: Q26.3@103.5,36.708 105.068,36.708 QS3.9@105.41,37.05
C23: Q27.3 QS3.11 | length 3.1
  Top Layer w0.4: QS3.11@106.5,29.72 107.03,30.25 Q27.3@109.358,30.25
C24: Q28.3 QS3.1 | length 2.1
  Top Layer w0.4: QS3.1@92.23,25.38 92.23,25.397 Q28.3@93.683,26.85
C25: Q29.3 QS3.12 | length 3
  Top Layer w0.4: Q29.3@102.058,27.15 103.93,27.15 QS3.12@104.7,26.38
C26: Q30.3 QS3.2 | length 2.4
  Top Layer w0.4: Q30.3@87.65,28.833 89.457,28.833 QS3.2@89.91,28.38
C27: Q31.3 QS3.6 | length 2.5
  Top Layer w0.4: Q31.3@93.5,42.158 94.948,40.71 QS3.6@95.36,40.71
C28: Q32.3 QS3.3 | length 2.5
  Top Layer w0.4: Q32.3@86.733,32.425 88.715,32.425 QS3.3@89.06,32.08
C29: Q33.3 QS3.5 | length 2.7
  Top Layer w0.4: QS3.5@92.05,38.86 93.425,37.485 Q33.3@93.425,36.692
C30: Q38.3 QS4.8 | length 2.7
  Top Layer w0.4: Q38.3@131.45,37.583 131.45,38.46 QS4.8@132.71,39.72
C31: Q39.3 QS4.14 | length 2.1
  Top Layer w0.4: Q39.3@127.871,25.449 127.871,23.452 QS4.14@127.938,23.385
C32: Q40.3 QS4.9 | length 3.1
  Top Layer w0.4: QS4.9@135.41,37.05 135.46,37.1 Q40.3@138.483,37.1
C33: Q41.3 QS4.11 | length 2.6
  Top Layer w0.4: QS4.11@136.5,29.72 136.655,29.875 Q41.3@139.008,29.875
C34: Q42.3 QS4.1 | length 2.2
  Top Layer w0.4: QS4.1@122.23,25.38 123.583,26.733 Q42.3@123.583,26.975
C35: Q43.3 QS4.12 | length 3
  Top Layer w0.4: Q43.3@131.883,26.85 134.23,26.85 QS4.12@134.7,26.38
C36: Q44.3 QS4.2 | length 3.2
  Top Layer w0.4: Q44.3@117.25,29.7 118.15,28.8 119.49,28.8 QS4.2@119.91,28.38
C37: Q45.3 QS4.6 | length 3.2
  Top Layer w0.4: Q45.3@122.308,40.95 125.12,40.95 QS4.6@125.36,40.71
C38: Q46.3 QS4.3 | length 2.7
  Top Layer w0.4: Q46.3@116.633,32.65 118.49,32.65 QS4.3@119.06,32.08
C39: Q47.3 QS4.5 | length 2.3
  Top Layer w0.4: QS4.5@122.05,38.86 123.518,37.392 Q47.3@123.75,37.392
C40: Q48.3 QS5.8 | length 2.1
  Top Layer w0.4: Q48.3@170.375,37.758 170.71,38.093 QS5.8@170.71,39.72
C41: Q49.3 QS5.14 | length 2.1
  Top Layer w0.4: QS5.14@165.938,23.385 165.938,25.416 Q49.3@165.971,25.449
C42: Q50.3 QS5.9 | length 2.7
  Top Layer w0.4: QS5.9@173.41,37.05 173.458,37.098 Q50.3@173.458,39.775
C43: Q51.3 QS5.11 | length 2.6
  Top Layer w0.4: QS5.11@174.5,29.72 174.605,29.825 Q51.3@177.083,29.825
C44: Q52.3 QS5.1 | length 2.5
  Top Layer w0.4: QS5.1@160.23,25.38 160.7,25.85 Q52.3@162.533,25.85
C45: Q53.3 QS5.12 | length 2.6
  Top Layer w0.4: Q53.3@170.508,27.425 171.553,26.38 QS5.12@172.7,26.38
C46: Q54.3 QS5.2 | length 2.9
  Top Layer w0.4: Q54.3@155.65,30 156.45,29.2 157.09,29.2 QS5.2@157.91,28.38
C47: Q55.3 QS5.6 | length 2.3
  Top Layer w0.4: Q55.3@162.408,42.65 162.408,41.662 QS5.6@163.36,40.71
C48: Q56.3 QS5.3 | length 2.6
  Top Layer w0.4: Q56.3@154.933,33.225 155.915,33.225 QS5.3@157.06,32.08
C49: Q57.3 QS5.5 | length 2.2
  Top Layer w0.4: QS5.5@160.05,38.86 160.9,38.01 Q57.3@160.9,37.042
C50: Q58.3 QS6.8 | length 2.6
  Top Layer w0.4: QS6.8@200.71,39.72 201.465,40.475 Q58.3@202.958,40.475
C51: Q59.3 QS6.14 | length 2.3
  Top Layer w0.4: Q59.3@195.943,25.576 195.943,23.317 QS6.14@195.95,23.31
C52: Q60.3 QS6.9 | length 2.8
  Top Layer w0.4: QS6.9@203.41,37.05 204.858,37.05 Q60.3@205.808,38
C53: Q61.3 QS6.11 | length 3.6
  Top Layer w0.4: QS6.11@204.5,29.72 206.245,29.72 207.2,30.675 Q61.3@207.683,30.675
C54: Q62.3 QS6.1 | length 2.5
  Top Layer w0.4: QS6.1@190.23,25.38 191.158,26.308 Q62.3@191.158,27.475
C55: Q63.3 QS6.12 | length 2.4
  Top Layer w0.4: Q63.3@200.783,27.6 202.003,26.38 QS6.12@202.7,26.38
C56: Q64.3 QS6.2 | length 3.2
  Top Layer w0.4: Q64.3@184.733,28.425 187.865,28.425 QS6.2@187.91,28.38
C57: Q65.3 QS6.6 | length 4.7
  Top Layer w0.4: QS6.6@193.36,40.71 194.85,39.22 Q65.3@194.85,36.592
C58: Q66.3 QS6.3 | length 3.2
  Top Layer w0.4: Q66.3@184.583,33.925 186.428,32.08 QS6.3@187.06,32.08
C59: Q67.3 QS6.5 | length 2.7
  Top Layer w0.4: QS6.5@190.05,38.86 190.735,38.175 Q67.3@192.442,38.175
GND: BT1.2 BZ1.2 C1.2 C2.2 C3.2 C4.2 C5.2 C6.2 C7.2 C8.2 C9.2 C10.2 C11.2 C12.2 C13.2 C14.2 C15.2 C16.2 C17.2 C18.2 C19.2 C20.2 C21.2 C22.2 C24.2 C25.2 C26.2 C27.1 C28.1 C29.2 C30.1 C31.1 D2.1 J1.2 J1.3 J2.4 JTAG1.4 JTAG1.6 JTAG1.8 JTAG1.10 JTAG1.12 JTAG1.14 JTAG1.16 JTAG1.18 JTAG1.20 pad.0 Q1.2 Q2.2 Q3.2 Q4.2 Q5.2 Q6.2 Q7.2 Q8.2 Q9.2 Q10.2 Q11.2 Q12.2 Q13.2 Q14.2 Q15.2 Q16.2 Q17.2 Q18.2 Q19.2 Q20.2 Q21.2 Q22.2 Q23.2 Q24.2 Q25.2 Q26.2 Q27.2 Q28.2 Q29.2 Q30.2 Q31.2 Q32.2 Q33.2 Q35.2 Q36.3 Q37.3 Q38.2 Q39.2 Q40.2 Q41.2 Q42.2 Q43.2 Q44.2 Q45.2 Q46.2 Q47.2 Q48.2 Q49.2 Q50.2 Q51.2 Q52.2 Q53.2 Q54.2 Q55.2 Q56.2 Q57.2 Q58.2 Q59.2 Q60.2 Q61.2 Q62.2 Q63.2 Q64.2 Q65.2 Q66.2 Q67.2 Q69.2 Q70.2 Q71.2 Q72.2 R16.2 R19.1 R22.1 R23.1 R110.1 S2.1 U1.3 U1.5 U2.12 U2.18 U2.31 U2.47 U2.63 U3.5 U3.6 U3.15 U3.33 U3.41 U3.45 U3.47 U3.48 U5.4 U6.8 U7.8 U8.8 U9.8 U10.8 U11.8 U12.8 U13.8 U14.2 U17.5 U17.6 U17.7 U17.8 U17.9 U17.10 U17.11 U17.12 U17.13 | length 111.7
  Top Layer w0.2: U3.45@120.51,8.065 120.52,8.075 121.175,8.075 121.575,8.475 v1(121.575,8.675) ; U3.5@123.91,5.165 U3.6@124.41,5.165 ; U2.18@147.303,18.859 147.35,18.906 147.35,19.825 148.125,20.6 149.025,20.6 149.794,21.369 C14.2@149.794,21.725 ; v1(148.625,14.5) 148.984,14.859 U2.12@149.803,14.859
  Top Layer w0.4: C16.2@18.926,22.699 C17.2@21.697,22.699
  Top Layer w0.8: C29.2@104.786,19.434 C26.2@109.358,19.434 ; U17.13@195.477,16.079 U17.12@196.747,16.079 U17.11@198.017,16.079 U17.10@199.287,16.079 U17.9@200.557,16.079 U17.8@200.557,5.814 ; U17.5@196.747,5.739 U17.6@198.017,5.739 U17.7@199.287,5.739 U17.8@200.557,5.739 U17.8@200.557,5.814 ; U17.8@200.482,5.814 U17.8@200.557,5.814 ; BT1.2@223.675,10.55 215.975,10.55 211.239,5.814 U17.8@200.557,5.814
  Top Layer w1: U1.3@81.783,15.523 71.367,15.523 71.317,15.574 74.666,18.923 U1.5@81.783,18.923 ; C11.2@112.171,7.877 C10.2@112.171,10.107 ; JTAG1.20@164.306,3.439 JTAG1.18@166.846,3.439 JTAG1.16@169.386,3.439 JTAG1.14@171.926,3.439 JTAG1.12@174.466,3.439 JTAG1.10@177.006,3.439 JTAG1.8@179.546,3.439 ; JTAG1.6@182.086,3.439 JTAG1.4@184.626,3.439
  Top Layer w2: D2.1@94.125,10.65 95.92,12.445 C3.2@95.92,15.587
  Bottom Layer w0.2: v1@137.3,19.3 137.95,18.65 140.475,18.65 140.8,18.975 v1@140.8,19.375
  other v1: 55.975,0.925 40.85,0.975 64.05,0.975 48.6,1.025 35.55,1.175 25.8,1.325 139.05,2.325 143.85,3 151.4,3 158.25,3.025 190.075,5.45 123.925,5.675 149.25,5.875 119.175,5.925 117.425,5.975 146.625,5.975 169.825,8.85 174.725,8.875 167.7,8.9 190.275,9.3 119.925,10.05 136.975,10.375 140.425,10.725 212.275,10.925 155.375,11.6 136.925,11.625 161.225,11.675 163.975,11.675 141.4,11.775 158.4,11.8 182.25,12.6 185.9,12.6 179.425,12.625 123.4,13.1 163.275,13.825 147.625,15.675 148.625,15.7 139.5,15.8 158.75,16.425 141.35,16.55 147.3,18.325 137.275,19.325 140.814,19.322 127.35,19.6 124.8,19.65 138.5,20.425 190.35,20.925 179.35,21.325 183.95,21.525 143,22.525 152,22.525 58.9,44.675 60.525,46.475 133.925,50.25 129.075,50.275 6.175,51.2 19.675,51.45 44.45,51.6 48.075,51.6 173.4,51.7 170.525,51.725 73.5,51.775 102.625,51.775 67.9,51.85 94.825,51.85 139.675,52.6 53.4,52.7 178.725,52.7 109.5,52.775 153.925,52.85 135.175,53.2 150.825,53.225 127.5,53.275 42.55,53.4 50.2,53.475 73.55,53.575 67.7,53.6 175.125,53.6 169.275,53.625 91.5,53.675 104.525,53.7
  other v2: 201.525,1.925 217.425,3.25 26.6,4.425 26.6,6.175 21.225,9.75 24.925,9.85 117.8,25.525 137.75,27.35 71.125,34.925 224.525,39.875 74.075,41.05 224.425,45 90.2,49.075 117.875,49.2 123.275,49.2 198.475,53.55 191.8,53.6
  other v7: 119.05,19.45
HV: C20.1 D3.2 R10.2 R11.2 R12.2 R13.2 R14.2 R15.2 R20.2 R85.2 R86.2 R87.2 R88.2 | length 208.8
  Top Layer w0.4: R86.2@76.588,31.259 75.219,32.628 75.219,38.371 76.588,39.74 R85.2@76.588,41.292
  Top Layer w0.5: D3.2@62.801,18.07 D3.2@62.947,17.924 ; R88.2@144.65,31.376 144.65,40.175 R87.2@145.325,40.85 ; R14.2@174.019,22.85 174.019,23.419 176.15,25.55 ; v3(174.575,27.125) 176.15,25.55 ; R15.2@186.287,22.087 182.825,25.55 176.15,25.55
  Top Layer w1: C20.1@60.236,13.723 62.947,16.434 D3.2@62.947,17.924 ; D3.2@62.801,18.07 R11.2@62.801,20.845 v3(62.9,20.845) 63.154,20.845 65.313,23.004 75.981,23.004 ; R86.2@76.588,31.259 75.981,30.652 75.981,23.004 ; v3@112.15,23.125 111.625,23.125 110.475,21.975 100.225,21.975 99.5,21.25 96.404,21.25 95.879,21.775 77.21,21.775 75.981,23.004
  Bottom Layer w0.5: v3(35.976,21.988) 35.988,21.988 37.131,23.131 41.469,23.131 43.755,20.845 v3(62.9,20.845) ; 156.499,26.576 156.499,24.655 v3(157.261,23.893) ; 156.5,26.5 158.725,26.5 160.65,28.425 173.25,28.425 v3@174.55,27.125
  Bottom Layer w0.8: v3(144.561,31.132) 149.895,31.132 154.207,26.82 156.255,26.82 156.499,26.576
  Bottom Layer w1: v3(112.225,23.1) 123.75,23.1 125.825,21.025 134.425,21.025 v3@144.588,31.187
  other v1: 42.2,22.375
  other v7: 136,22.225
LED1: U3.39 U16.11 | length 113.1
  Top Layer w0.254: v1(117.35,11.1) 117.8,10.65 119.25,10.65 119.665,11.065 U3.39@120.51,11.065
  Bottom Layer w0.254: U16.11@14.9,17.8 14.9,15.475 19.575,10.8 29.6,10.8 32.853,7.547 66.365,7.547 68.921,10.103 116.303,10.103 v1@117.35,11.15
LED2: U3.38 U16.9 | length 110
  Top Layer w0.254: v1@118.975,11.35 119,11.35 119.215,11.565 U3.38@120.51,11.565
  Bottom Layer w0.254: U16.9@14.9,6.375 17.705,3.57 29.57,3.57 33.05,7.05 66.55,7.05 69.171,9.671 116.796,9.671 118.475,11.35 v1(118.925,11.35)
NetBT1_1: BT1.1 C30.2 U17.14 | length 19.9
  Top Layer w0.4: U17.14@194.207,16.079 194.207,18.753 C30.2@195.44,19.986 198.964,19.986 205.4,13.55 BT1.1@205.4,10.675
NetBZ1_1: BZ1.1 Q68.3 | length 9.4
  Top Layer w0.4: Q68.3@206.625,27.6 213.55,27.6 BZ1.1@215.275,25.875
NetC4_1: C4.1 U2.5 Y1.2 | length 9.9
  Top Layer w0.2: U2.5@149.803,11.359 152.853,11.359 Y1.2@154.95,9.262 158.771,9.262 C4.1@158.784,9.275
NetC7_1: C7.1 U2.6 Y1.1 | length 9.9
  Top Layer w0.2: U2.6@149.803,11.859 152.667,11.859 Y1.1@154.95,14.142 158.732,14.142 C7.1@158.769,14.105
NetC10_1: C10.1 U3.43 Y2.2 | length 9.6
  Top Layer w0.2: C10.1@112.171,12.167 115.119,12.167 Y2.2@115.981,11.305 118.221,9.065 U3.43@120.51,9.065
NetC11_1: C11.1 U3.44 Y2.1 | length 9.5
  Top Layer w0.2: C11.1@112.171,5.817 115.373,5.817 Y2.1@115.981,6.425 118.121,8.565 U3.44@120.51,8.565
NetC18_1: C18.1 C19.1 L2.1 Q34.3 U4.5 U4.6 U4.7 U4.8 U5.1 U5.6 U5.7 U5.8 | length 41.7
  Top Layer w0.4: U5.6@41.194,16.781 40.167,16.781 39.786,16.4 39.786,15.064 40.13,14.72 43.138,14.72 44.376,13.482 Q34.3@44.376,12.762
  Top Layer w1: U4.8@28.367,21.353 U4.7@28.367,20.083 U4.6@28.367,18.813 U4.5@28.367,17.543 32.293,17.543 ; C19.1@35.214,13.225 33.817,14.622 33.385,14.622 C18.1@32.42,15.587 32.42,17.416 32.293,17.543 ; C19.1@35.264,13.196 C19.1@35.264,13.45 ; U5.6@41.194,16.781 U5.7@41.194,18.051 U5.8@41.194,19.321 41.321,19.448 42.453,19.448 45.501,22.496 L2.1@45.501,23.385 ; U5.8@41.564,19.321 34.546,19.321 32.794,17.569 32.819,17.543 32.293,17.543
NetC21_1: C21.1 U5.5 | length 3.9
  Top Layer w0.4: U5.5@41.194,15.511 43.85,15.511 44.612,16.273 C21.1@44.739,16.273
NetC22_1: C22.1 R20.1 R23.2 U5.3 | length 11.4
  Top Layer w0.4: R23.2@39.758,26.433 39.758,21.889 R20.1@39.786,21.861
  Bottom Layer w0.4: v7(35.6,16.75) 35.6,17.625 v7(39.775,21.8)
NetC23_1: C23.1 C24.1 C25.1 | length 5.7
  Top Layer w0.4: C25.1@25.054,12.717 C24.1@25.054,14.495 ; C24.1@25.054,15.13 C24.1@25.054,14.495 ; C23.1@28.356,14.495 C24.1@25.054,14.495
NetC23_2: C23.2 R90.2 R91.2 R92.2 | length 58.7
  Top Layer w0.2: R91.2@24.875,3.987 R92.2@24.875,6.4 ; C23.2@28.356,9.415 30.893,6.878 77.559,6.878 R90.2@78.431,7.75
  Bottom Layer w0.2: v2(24.825,6.35) 25.291,6.35 C23.2@28.356,9.415
NetC26_1: C26.1 R95.1 R96.1 | length 5.4
  Top Layer w0.4: C26.1@109.358,17.374 111.39,19.406 R95.1@113.9,19.406
NetC29_1: C29.1 R108.1 R109.1 | length 5.4
  Top Layer w0.4: R109.1@100.214,19.406 R108.1@102.5,19.406 104.532,17.374 C29.1@104.786,17.374
NetD1_1: D1.1 R3.2 | length 2.6
  Top Layer w0.3: R3.2@217.894,52.775 219.469,51.2 v9(219.85,51.2)
NetD1_2: D1.2 R2.1 | length 2.2
  Top Layer w0.3: R2.1@217.891,50.475 219.35,50.475 v9(219.875,49.95)
NetD1_3: D1.3 R1.2 | length 2.1
  Top Layer w0.3: R1.2@217.919,48.175 219.4,48.175 v9(219.85,48.625)
NetD1_4: D1.4 Q3.3 | length 7
  Top Layer w0.3: v8(207.225,51.25) 207.225,51.4 207.95,52.125 210.425,52.125 210.883,52.583 Q3.3@213.625,52.583
NetD1_5: D1.5 Q2.3 | length 5.5
  Top Layer w0.3: v8(205.8,49.875) 208.125,49.875 208.45,50.2 211.092,50.2 Q2.3@211.125,50.233
NetD1_6: D1.6 Q1.3 | length 5.6
  Top Layer w0.3: v8(207.25,48.65) 207.625,48.275 212.517,48.275 Q1.3@212.667,48.425
NetD2_2: D2.2 L1.1 U1.2 | length 11.7
  Top Layer w1: U1.2@81.783,13.823 87.368,13.823 L1.1@88.312,14.768 88.312,11.188 D2.2@89.15,10.35
NetD3_1: D3.1 L2.2 Q36.2 | length 15.2
  Top Layer w1: L2.2@50.454,23.385 50.708,23.131 50.708,19.575 ; Q36.2@51.216,16.4 50.708,16.908 50.708,19.575 ; D3.1@57.947,17.924 55.788,17.924 54.137,19.575 50.708,19.575
NetD4_1: D4.1 R85.1 | length 2.6
  Top Layer w0.4: R85.1@78.648,41.292 78.648,39.065 D4.1@78.938,38.775
NetD4_2: D4.2 Q69.3 | length 1.6
  Top Layer w0.4: D4.2@78.938,33.775 80.381,33.775 Q69.3@80.458,33.852
NetD5_1: D5.1 R86.1 | length 2.6
  Top Layer w0.4: R86.1@78.648,31.259 78.648,29.065 D5.1@78.938,28.775
NetD5_2: D5.2 Q70.3 | length 3.8
  Top Layer w0.4: D5.2@78.775,23.766 80.913,23.766 Q70.3@82.109,24.962
NetD6_1: D6.1 R87.1 | length 2.7
  Top Layer w0.4: D6.1@146.938,38.775 147.45,39.287 R87.1@147.45,41.292
NetD6_2: D6.2 Q71.3 | length 1.3
  Top Layer w0.4: D6.2@146.938,33.775 Q71.3@148.226,33.775
NetD7_1: D7.1 R88.1 | length 2.6
  Top Layer w0.4: R88.1@146.593,31.259 146.593,29.12 D7.1@146.938,28.775
NetD7_2: D7.2 Q72.3 | length 3.4
  Top Layer w0.4: D7.2@146.938,23.775 147.872,23.775 Q72.3@149.641,25.544
NetJ1_1: J1.1 S1.1 S1.2 S1.5 S1.6 | length 22.4
  Bottom Layer w2: 1.35,35.9 13.8,35.9 16.025,38.125 16.025,41.275 14.404,42.896 J1.1@14.404,44.247
NetQ1_1: Q1.1 R5.1 | length 2.2
  Top Layer w0.3: R5.1@209.666,46.875 211.267,46.875 Q1.1@211.717,46.425
NetQ2_1: Q2.1 R6.1 | length 5.2
  Top Layer w0.3: R6.1@204.275,50.766 206.109,50.766 206.375,50.5 207.7,50.5 208.383,51.183 Q2.1@209.125,51.183
NetQ3_1: Q3.1 R7.1 | length 2.4
  Top Layer w0.5: R7.1@209.05,53.375 Q3.1@211.425,53.375
NetQ34_1: Q34.1 Q37.1 R17.2 | length 6.8
  Top Layer w0.4: R17.2@39.864,13.45 42.114,13.45 Q34.1@42.376,13.712 43.325,12.763 43.325,11.232 Q37.1@42.376,10.283
NetQ34_2: Q34.2 Q36.1 Q37.2 R19.2 | length 17.7
  Top Layer w0.4: R19.2@39.864,8.624 40.105,8.383 Q37.2@42.376,8.383 42.376,8.876 43.005,9.505 43.032,9.505 45.678,12.151 45.678,13.783 ; 41.106,8.45 41.106,10.783 42.135,11.812 Q34.2@42.376,11.812 ; 45.628,13.733 45.678,13.783 ; 45.678,13.958 45.678,13.783 ; Q36.1@48.549,16.654 45.678,13.783
NetQ35_1: Q35.1 R18.2 | length 5.4
  Top Layer w0.3: R18.2@17.688,15.793 16.825,16.656 16.825,19.025 17.633,19.833 Q35.1@18.3,19.833
NetQ35_3: Q35.3 R21.2 U4.4 | length 8.1
  Top Layer w0.3: R21.2@20.101,13.705 20.955,13.705 21.425,14.175 21.425,17.543 ; Q35.3@20.3,18.883 20.3,18.525 21.282,17.543 21.425,17.543 ; U4.4@22.779,17.543 21.425,17.543
NetQ68_1: Q68.1 R89.1 | length 3.5
  Top Layer w0.4: R89.1@205.225,22.166 205.617,22.558 Q68.1@205.617,25.525
NetQ68_2: Q68.2 R84.2 | length 3.4
  Top Layer w0.4: R84.2@207.525,22.219 207.567,22.261 Q68.2@207.567,25.6
NetQ69_1: Q69.1 R97.2 | length 2.3
  Top Layer w0.4: R97.2@81.95,30.779 82.458,31.287 Q69.1@82.458,32.902
NetQ70_1: Q70.1 R98.2 | length 2.4
  Top Layer w0.4: Q70.1@84.109,24.012 85.006,24.909 R98.2@86.113,24.909
NetQ71_1: Q71.1 R99.2 | length 2.2
  Top Layer w0.4: R99.2@150.149,30.652 150.276,30.779 Q71.1@150.276,32.775
NetQ72_1: Q72.1 R100.2 | length 3.7
  Top Layer w0.4: Q72.1@151.546,24.647 151.546,24.655 153.987,27.096 R100.2@154.213,27.096
NetQS1_13: QS1.13 R10.1 | length 2.2
  Top Layer w0.5: QS1.13@33.66,24.11 33.817,23.953 R10.1@33.817,21.988
NetQS2_13: QS2.13 R11.1 | length 4.5
  Top Layer w0.4: R11.1@60.741,20.845 60.741,21.191 QS2.13@63.66,24.11
NetQS3_13: QS3.13 R12.1 | length 6
  Top Layer w0.5: QS3.13@101.66,24.11 107.219,24.11 R12.1@107.5,24.391
NetQS4_13: QS4.13 R13.1 | length 3
  Top Layer w0.4: QS4.13@131.66,24.11 133.445,22.325 R13.1@133.909,22.325
NetQS5_13: QS5.13 R14.1 | length 2.8
  Top Layer w0.4: QS5.13@169.66,24.11 170.92,22.85 R14.1@171.959,22.85
NetQS6_13: QS6.13 R15.1 | length 12.7
  Bottom Layer w0.5: v7(188.4,22.2) 191.35,22.2 192.075,21.475 197.025,21.475 QS6.13@199.66,24.11
NetR4_2: R4.2 U3.19 | length 7.1
  Top Layer w0.254: U3.19@129.01,9.565 128.26,9.565 127.575,10.25 127.575,12.535 129.54,14.5 R4.2@129.856,14.5
NetR16_1: R16.1 U3.1 | length 4.1
  Top Layer w0.2: R16.1@120.591,1.6 120.591,3.341 121.91,4.66 U3.1@121.91,5.165
NetR17_1: R17.1 R22.2 U5.2 | length 8.9
  Top Layer w0.4: U5.2@35.606,18.051 36.865,18.051 37.726,17.19 R22.2@37.726,10.812
NetR24_2: R24.2 U6.15 | length 14.3
  Top Layer w0.2: U6.15@24.919,51.041 24.919,50.531 27.725,47.725 32.406,47.725 R24.2@36.031,44.1
NetR25_2: R25.2 U7.15 | length 36.3
  Bottom Layer w0.2: v1(19.775,39.6) 21.775,39.6 28.375,46.2 46.475,46.2 v1(51.325,51.05)
NetR26_2: R26.2 U8.15 | length 37.7
  Top Layer w0.2: R26.2@46.9,39.519 48.847,41.466 48.847,45.617 50.98,47.75 64.75,47.75 v1(64.975,47.975) ; v1(67.95,50.05) 68.1,49.9 76.325,49.9 76.862,50.437 U8.15@76.862,51.041
  Bottom Layer w0.2: v1@64.95,47.975 67.025,50.05 v1(67.95,50.05)
NetR27_2: R27.2 U9.15 | length 26
  Top Layer w0.2: R27.2@91.75,33.419 91.75,33.425 94.4,36.075 94.4,38.075 95.1,38.775 95.725,38.775 97.25,40.3 97.25,41.475 99.2,43.425 99.2,44.8 v1(99.95,45.55)
  Bottom Layer w0.2: v1(99.95,45.55) 102.5,45.55 107.45,50.5 v1(107.45,51.05)
NetR28_2: R28.2 U10.15 | length 10.6
  Bottom Layer w0.2: v1@136.15,41 v1(136.175,41.025) 136.175,47.575 137.425,48.825 v1(137.425,51.05)
NetR29_2: R29.2 U11.15 | length 20.3
  Bottom Layer w0.2: v1(152.05,51.075) 155.8,47.325 166.45,47.325 v1@169.525,44.25
  other v1: 169.475,44.275
NetR30_2: R30.2 U12.15 | length 27.5
  Bottom Layer w0.2: v1@155.725,40.075 159.325,43.675 172.7,43.675 176.7,47.675 v1(176.7,51.05)
  other v1: 155.75,40.075
NetR31_2: R31.2 U13.15 | length 22.4
  Bottom Layer w0.2: v1@181.75,34.575 180.35,35.975 180.35,42.3 185.85,47.8 187.825,47.8 190.525,50.5 v1(190.525,51.025)
  other v1: 181.75,34.6
NetR32_2: R32.2 U6.1 | length 17.9
  Top Layer w0.2: U6.1@23.649,44.941 23.649,44.201 25.3,42.55 27.95,42.55 28.95,41.55 28.95,39.8 v1(28.625,39.475)
  Bottom Layer w0.2: v1(28.625,39.475) 28.625,37.825 33.125,33.325 v1(33.675,33.325)
NetR33_2: R33.2 U7.1 | length 24
  Bottom Layer w0.2: v1(29.25,38.075) 29.675,37.65 35.275,37.65 42.55,44.925 v1(50.05,44.925)
NetR34_2: R34.2 U8.1 | length 8.6
  Top Layer w0.4: R34.2@67.869,46.05 75.15,46.05 75.592,45.608 U8.1@75.592,44.941
NetR35_2: R35.2 U9.1 | length 15.5
  Top Layer w0.2: R35.2@101.925,33.219 103.731,35.025 105.925,35.025 107.125,36.225 107.125,43.175 106.199,44.101 U9.1@106.199,44.941
NetR36_2: R36.2 U10.1 | length 12.8
  Top Layer w0.2: R36.2@134.125,33.369 133.7,33.794 133.7,37.625 135.05,38.975 135.05,42.1 136.171,43.221 U10.1@136.171,44.941
NetR37_2: R37.2 U11.1 | length 18.9
  Top Layer w0.2: U11.1@150.776,44.941 U11.1@150.776,45.601 ; v1@155.65,43.475 157.978,41.147 157.978,38.422 161.975,34.425 R37.2@161.975,33.394
  Bottom Layer w0.2: v1(150.75,44.95) 151.825,43.875 155.275,43.875 155.675,43.475 v1(155.675,43.45)
NetR38_2: R38.2 U12.1 | length 15
  Bottom Layer w0.2: v1@164.925,38.275 164.925,41.275 166.85,43.2 173.7,43.2 175.425,44.925 v1(175.45,44.925)
  other v1: 164.925,38.25
NetR39_2: R39.2 U13.1 | length 15.7
  Top Layer w0.2: U13.1@189.257,44.941 189.257,45.557 189.825,46.125 193.25,46.125 193.7,45.675 193.7,43.025 195.4,41.325 195.4,40.4 197.608,38.192 198.602,38.192 R39.2@198.675,38.119
NetR40_2: R40.2 U6.2 | length 10.7
  Top Layer w0.2: U6.2@24.919,44.941 24.919,44.256 26.247,42.928 28.197,42.928 29.5,41.625 29.5,40.05 R40.2@31.475,38.075
NetR41_2: R41.2 U7.2 | length 16.9
  Top Layer w0.2: U7.2@51.335,44.941 51.335,46.035 51.803,46.503 59.472,46.503 61.025,44.95 64.581,44.95 R41.2@65.781,43.75
NetR42_2: R42.2 U8.2 | length 35.6
  Top Layer w0.2: R42.2@49.225,39.519 49.225,45.461 51.089,47.325 65.93,47.325 66.155,47.1 75.2,47.1 76.862,45.438 U8.2@76.862,44.941
NetR43_2: R43.2 U9.2 | length 26.5
  Top Layer w0.2: R43.2@84.9,39.219 84.9,39.625 86.15,40.875 87.725,40.875 92.975,46.125 106.9,46.125 107.469,45.556 U9.2@107.469,44.941
NetR44_2: R44.2 U10.2 | length 21.7
  Top Layer w0.2: v1@135,44.625 135,45.075 135.894,45.969 137.006,45.969 137.441,45.534 U10.2@137.441,44.941
  Bottom Layer w0.2: v1@121.938,34.312 123.25,35.625 126.65,35.625 131.056,40.031 131.056,40.431 134.1,43.475 134.1,43.675 v1@134.975,44.55
  other v1: 121.925,34.325 135,44.65
NetR45_2: R45.2 U11.2 | length 22.6
  Top Layer w0.2: U11.2@152.046,44.941 152.046,45.696 154.475,48.125 164.325,48.125 164.675,47.775 169.894,47.775 R45.2@171.9,45.769
NetR46_2: R46.2 U12.2 | length 27.3
  Top Layer w0.2: U12.2@176.684,44.941 176.684,45.459 178.4,47.175 186.675,47.175 v1(186.925,46.925)
  Bottom Layer w0.2: v1(186.925,46.925) 187.094,46.756 195.558,46.756 198.014,44.3 v1(201.525,44.3)
NetR47_2: R47.2 U13.2 | length 9.3
  Top Layer w0.2: R47.2@183.55,40.419 186.006,42.875 189.175,42.875 190.527,44.227 U13.2@190.527,44.941
NetR48_2: R48.2 U6.3 | length 19.9
  Top Layer w0.2: U6.3@26.189,44.941 26.189,44.136 27.019,43.306 28.354,43.306 28.359,43.3 31.275,43.3 v1@32.287,42.287 ; v1(33.825,41.8) 34.925,41.8 35.675,41.05 38.575,41.05 41.65,37.975 R48.2@41.65,36.869
  Bottom Layer w0.2: v1@32.3,42.325 v1(32.3,42.3) 32.8,41.8 v1@33.8,41.8
NetR49_2: R49.2 U7.3 | length 12.8
  Top Layer w0.2: U7.3@52.605,44.941 52.605,43.054 56.15,39.509 56.15,33.744 R49.2@56.05,33.644
NetR50_2: R50.2 U8.3 | length 27.7
  Top Layer w0.2: v1@65.788,47.962 65.827,47.962 66.312,47.478 76.247,47.478 78.132,45.593 U8.3@78.132,44.941
  Bottom Layer w0.2: v1(59.15,38.225) 59.15,41.65 60.475,42.975 62.55,42.975 63.875,44.3 63.875,46.025 v1(65.8,47.95)